# Altium PCB IR60-19_5GF.PcbDoc
Units mm, origin at the board's own origin, x right, y up, seen from the top; angles counter-clockwise.
Board outline 60 x 19.5 mm, 2 copper layers (Top Layer, Bottom Layer); 36 components, 34 nets, 72 pads, 32 vias.
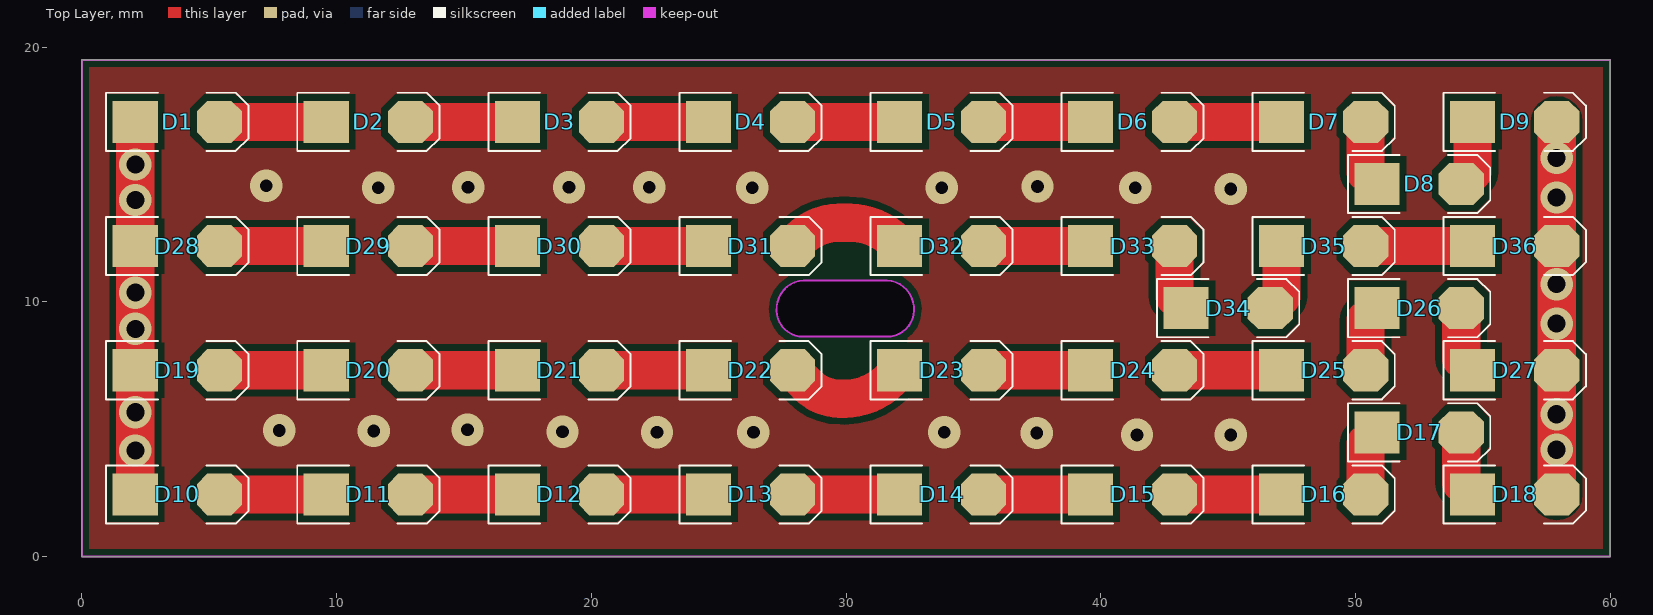
[diagram p0: Top Layer view]
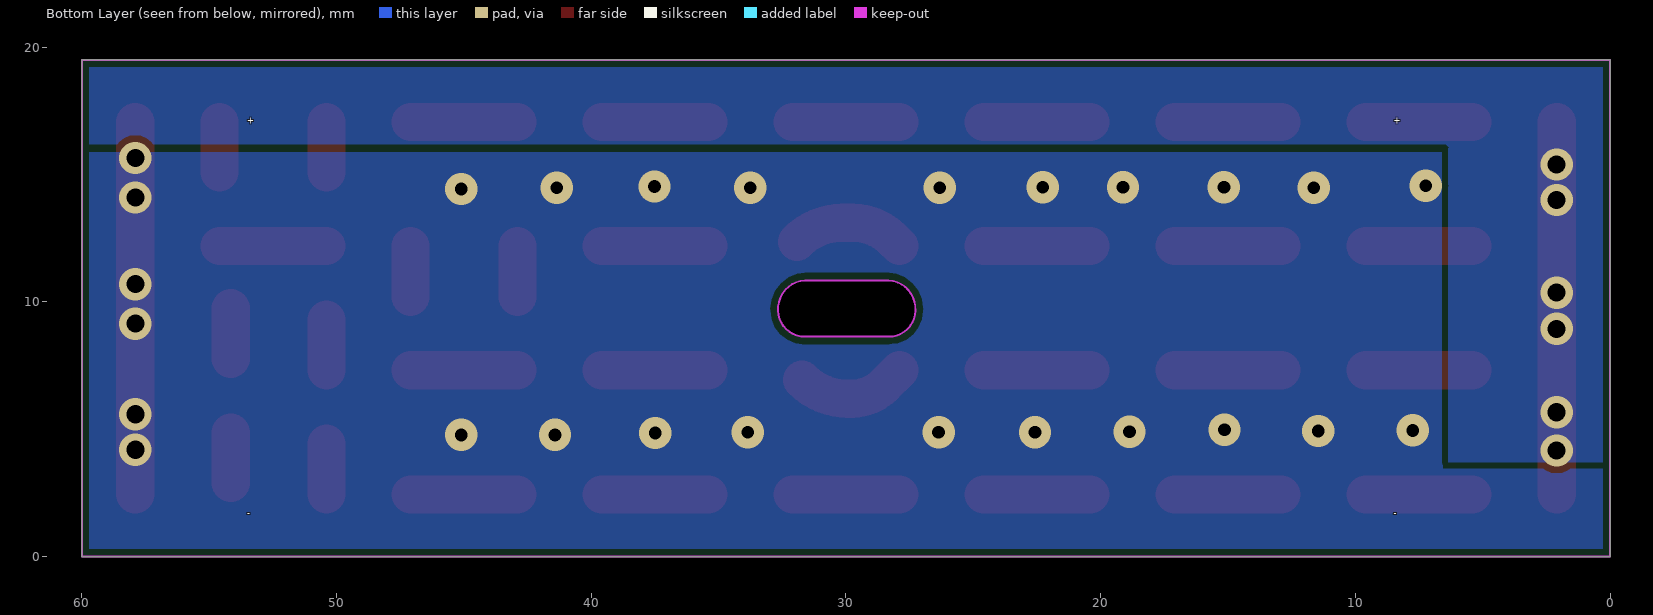
[diagram p1: Bottom Layer view, seen from below]
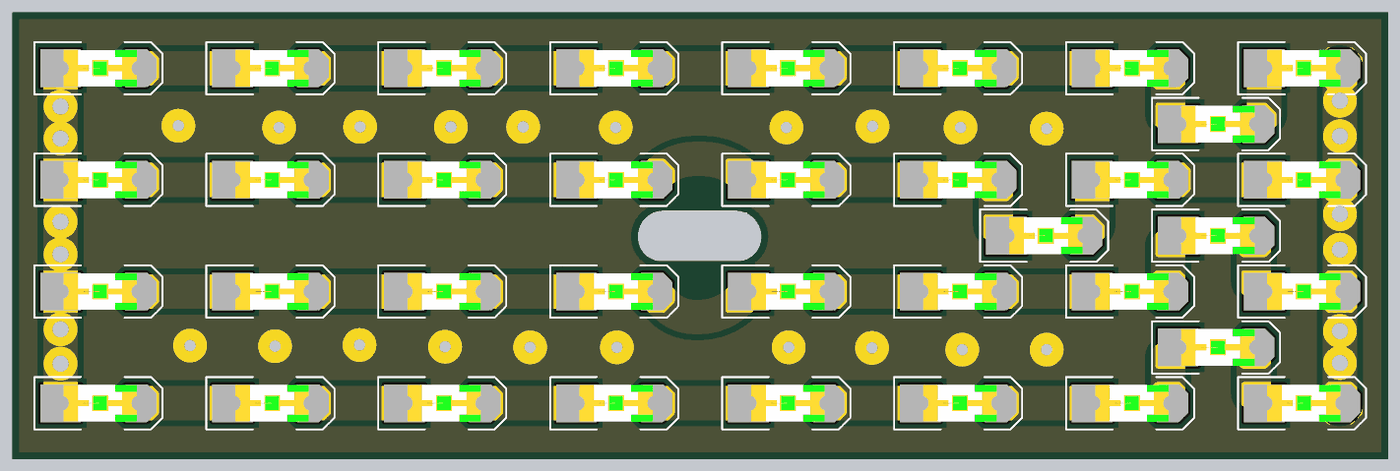
[diagram p2: 3D render of the assembled board from above, using the file's embedded part models]

## Layer stack, top to bottom
Top Solder: solder mask 0.0102, Solder Resist, Dk 3.5
Top Layer: signal copper 0.0356
Dielectric 1: dielectric 0.32, FR-4, Dk 4.8
Bottom Layer: signal copper 0.0356
Bottom Solder: solder mask 0.0102, Solder Resist, Dk 3.5

## Board outline
0,0 60,0 60,19.5 0,19.5
cut-out: 27.28,9.652 ccw(c28.308,9.665) 28.321,8.636 31.598,8.636 ccw(c31.623,9.677) 32.664,9.652 ccw(c31.54,9.721) 31.609,10.846 28.321,10.846 ccw(c28.397,9.728)

## Design rules (kind name [scope] priority, off if disabled: settings)
Clearance [All] p1: gap=0.254 ignorepadtopadclearanceinfootprint=FALSE except(0: Arc-Hole Track-Hole SMDPad-Hole THPad-Hole Via-Hole Fill-Hole Poly-Hole Region-Hole Text-Hole)
PolygonConnect [All] p1: connectstyle=Direct reliefconductorwidth=0.254 reliefentries=4 polygonreliefangle="90 Angle" airgapwidth=0.254
RoutingVias [All] p1: holewidth=0.711 width=1.27 viastyle="Through Hole" minholewidth=0.711 minwidth=1.27 maxholewidth=0.711 maxwidth=1.27
SolderMaskExpansion [All] p1: expansion=0.102
Width [All] p1: maxlimit=2 minlimit=0.254 preferedwidth=0.254 minimp=50.000000 maximp=50.000000 favimp=50.000000
30 further rules are at their usual default settings.

## Components (designator, comment, footprint, x,y, rotation, side; value= is the part's Value field where it differs from the comment)
D1 "LED1206" IRLED2835M 3.75,17.066 r0 top
D2 "LED1206" IRLED2835M 11.25,17.066 r0 top
D3 "LED1206" IRLED2835M 18.75,17.066 r0 top
D4 "LED1206" IRLED2835M 26.25,17.066 r0 top
D5 "LED1206" IRLED2835M 33.75,17.066 r0 top
D6 "LED1206" IRLED2835M 41.25,17.066 r0 top
D7 "LED1206" IRLED2835M 48.75,17.066 r0 top
D8 "LED1206" IRLED2835M 52.5,14.628 r0 top
D9 "LED1206" IRLED2835M 56.25,17.066 r0 top
D10 "LED1206" IRLED2835M 3.75,2.438 r0 top
D11 "LED1206" IRLED2835M 11.25,2.438 r0 top
D12 "LED1206" IRLED2835M 18.75,2.438 r0 top
D13 "LED1206" IRLED2835M 26.25,2.438 r0 top
D14 "LED1206" IRLED2835M 33.75,2.438 r0 top
D15 "LED1206" IRLED2835M 41.25,2.438 r0 top
D16 "LED1206" IRLED2835M 48.75,2.438 r0 top
D17 "LED1206" IRLED2835M 52.5,4.876 r0 top
D18 "LED1206" IRLED2835M 56.25,2.438 r0 top
D19 "LED1206" IRLED2835M 3.75,7.314 r0 top
D20 "LED1206" IRLED2835M 11.25,7.314 r0 top
D21 "LED1206" IRLED2835M 18.75,7.314 r0 top
D22 "LED1206" IRLED2835M 26.25,7.314 r0 top
D23 "LED1206" IRLED2835M 33.75,7.314 r0 top
D24 "LED1206" IRLED2835M 41.25,7.314 r0 top
D25 "LED1206" IRLED2835M 48.75,7.314 r0 top
D26 "LED1206" IRLED2835M 52.5,9.752 r0 top
D27 "LED1206" IRLED2835M 56.25,7.314 r0 top
D28 "LED1206" IRLED2835M 3.75,12.19 r0 top
D29 "LED1206" IRLED2835M 11.25,12.19 r0 top
D30 "LED1206" IRLED2835M 18.75,12.19 r0 top
D31 "LED1206" IRLED2835M 26.25,12.19 r0 top
D32 "LED1206" IRLED2835M 33.75,12.19 r0 top
D33 "LED1206" IRLED2835M 41.25,12.19 r0 top
D34 "LED1206" IRLED2835M 45,9.752 r0 top
D35 "LED1206" IRLED2835M 48.75,12.19 r0 top
D36 "LED1206" IRLED2835M 56.25,12.19 r0 top

## Footprints (in the part's own frame and the unit in brackets; to place one, negate y for a bottom-side part, rotate by r counter-clockwise, add the part's x,y. Pads: shape width x height; smd on the part's side, far side on the other; paste and mask are expansions set on the pad)
IRLED2835M [mil]
  rect 70x65 smd: 1(-65,0)
  oct 70x65 smd: 2(65,0)
  silkscreen extent -110,-45 110,45, body extent -60,-32 66,32, height 36

## Via types
v1: diameter 1.27, hole 0.5, Top Layer to Bottom Layer, 20 vias
v2: diameter 1.27, hole 0.712, Top Layer to Bottom Layer, 12 vias

## Nets (pads, with @x,y where several pads share a name; then routed paths per layer and width w, separated by ;. In a path a pad name is that pad's centre, name@x,y a point inside that pad or via, vN(x,y) a via of type N, cw(c..) or ccw(c..) an arc to the next point about the centre after c; other vN are vias at no path point)
GND: D9.2 D18.2 D27.2 D36.2 | length 14.6
  Top Layer w1.5: D18.2 D27.2 D36.2 D9.2
  other v1: 41.427,4.775 45.11,4.775 37.49,4.851 22.581,4.877 26.365,4.877 33.858,4.877 18.872,4.902 11.455,4.928 7.747,4.953 15.138,4.978 45.11,14.427 11.633,14.478 26.314,14.478 33.757,14.478 41.351,14.478 15.164,14.503 19.126,14.503 22.276,14.503 37.516,14.529 7.239,14.554
  other v2: 57.901,4.191 57.901,5.588 57.901,9.144 57.901,10.693 57.901,14.097 57.901,15.646
NetD1_2: D1.2 D2.1 | length 4.2
  Top Layer w1.5: D1.2 D2.1
NetD2_2: D2.2 D3.1 | length 4.2
  Top Layer w1.5: D2.2 D3.1
NetD3_2: D3.2 D4.1 | length 4.2
  Top Layer w1.5: D3.2 D4.1
NetD4_2: D4.2 D5.1 | length 4.2
  Top Layer w1.5: D4.2 D5.1
NetD5_2: D5.2 D6.1 | length 4.2
  Top Layer w1.5: D5.2 D6.1
NetD6_2: D6.2 D7.1 | length 4.2
  Top Layer w1.5: D6.2 D7.1
NetD7_2: D7.2 D8.1 | length 2
  Top Layer w1.5: D8.1@50.401,15.076 D7.2
NetD8_2: D8.2 D9.1 | length 2
  Top Layer w1.5: D8.2@54.599,15.076 D9.1
NetD10_2: D10.2 D11.1 | length 4.2
  Top Layer w1.5: D10.2 D11.1
NetD11_2: D11.2 D12.1 | length 4.2
  Top Layer w1.5: D11.2 D12.1
NetD12_2: D12.2 D13.1 | length 4.2
  Top Layer w1.5: D12.2 D13.1
NetD13_2: D13.2 D14.1 | length 4.2
  Top Layer w1.5: D13.2 D14.1
NetD14_2: D14.2 D15.1 | length 4.2
  Top Layer w1.5: D14.2 D15.1
NetD15_2: D15.2 D16.1 | length 4.2
  Top Layer w1.5: D15.2 D16.1
NetD16_2: D16.2 D17.1 | length 2
  Top Layer w1.5: D16.2 D17.1@50.401,4.428
NetD17_2: D17.2 D18.1 | length 2
  Top Layer w1.5: D18.1@54.151,2.886 D17.2
NetD19_2: D19.2 D20.1 | length 4.2
  Top Layer w1.5: D19.2 D20.1
NetD20_2: D20.2 D21.1 | length 4.2
  Top Layer w1.5: D20.2 D21.1
NetD21_2: D21.2 D22.1 | length 4.2
  Top Layer w1.5: D21.2 D22.1
NetD22_2: D22.2 D23.1 | length 4.4
  Top Layer w1.5: D22.2 28.486,6.729 ccw(c29.769,8.012) 29.769,6.198 29.93,6.198 ccw(c29.93,8.738) D23.1@31.727,6.942
NetD23_2: D23.2 D24.1 | length 4.2
  Top Layer w1.5: D23.2 D24.1
NetD24_2: D24.2 D25.1 | length 4.2
  Top Layer w1.5: D24.2 D25.1
NetD25_2: D25.2 D26.1 | length 2
  Top Layer w1.5: D25.2 D26.1@50.401,9.304
NetD26_2: D26.2 D27.1 | length 2
  Top Layer w1.5: D27.1@54.151,7.762 D26.2
NetD28_2: D28.2 D29.1 | length 4.2
  Top Layer w1.5: D28.2 D29.1
NetD29_2: D29.2 D30.1 | length 4.2
  Top Layer w1.5: D29.2 D30.1
NetD30_2: D30.2 D31.1 | length 4.2
  Top Layer w1.5: D30.2 D31.1
NetD31_2: D31.2 D32.1 | length 4.5
  Top Layer w1.5: D31.2 28.163,12.452 cw(c29.743,10.871) 29.743,13.106 30.13,13.106 cw(c30.13,10.566) D32.1@31.927,12.362
NetD32_2: D32.2 D33.1 | length 4.2
  Top Layer w1.5: D32.2 D33.1
NetD33_2: D33.2 D34.1 | length 2
  Top Layer w1.5: D34.1@42.901,10.2 D33.2
NetD34_2: D34.2 D35.1 | length 2
  Top Layer w1.5: D34.2@47.099,10.2 D35.1
NetD35_2: D35.2 D36.1 | length 4.2
  Top Layer w1.5: D35.2 D36.1
VCC: D1.1 D10.1 D19.1 D28.1 | length 14.6
  Top Layer w1.5: D10.1 D19.1 D28.1 D1.1
  other v2: 2.099,4.166 2.099,5.664 2.099,8.941 2.099,10.363 2.099,13.995 2.099,15.392

## Polygon pours and split planes (outlines as drawn)
GND on Top Layer "mos_gnd" (solid, remove dead copper, pour order 14): 0,19.5 0,0 60,0 60,19.5
GND on Bottom Layer "mos_gnd" (solid, remove dead copper, pour order 20): 0,0 0,3.429 0.025,3.454 6.579,3.454 6.579,15.85 6.604,15.875 59.969,15.875 59.969,0.031 60,0
VCC on Bottom Layer "mos_gnd" (solid, remove dead copper, pour order 18): 0,3.683 0.025,3.708 6.35,3.708 6.35,16.027 6.325,16.053 6.452,16.18 60,16.18 60,19.5 0,19.5
GND on Bottom Layer "mos_gnd" (solid, remove dead copper, pour order 16): 0,3.683

## Keep-outs
Keep-Out Layer:
  lines w0.076: 0,0 0,19.5 60,19.5 60,0 0,0 ; 27.28,9.652 ccw(c28.308,9.665) 28.321,8.636 29.972,8.636 31.598,8.636 ccw(c31.623,9.677) 32.664,9.652 ccw(c31.54,9.721) 31.609,10.846 30.023,10.846 28.321,10.846 ccw(c28.397,9.728) 27.28,9.652

## Silkscreen, mask and mechanical layers (free items; w line width, h text height)
Bottom Overlay:
  text "+" at 8.23,16.99 h0.25
  text "+" at 53.23,16.99 h0.25
  text "-" at 8.38,1.59 h0.25
  text "-" at 53.38,1.59 h0.25
Bottom Solder:
  region: 55.1,18.78 55.11,18.77 59.33,18.77 59.33,16.68 59.32,16.69 55.1,16.69
  region: 55.03,2.785 55.04,2.775 59.26,2.775 59.26,0.685 59.25,0.695 55.03,0.695
  region: 0.61,2.825 0.62,2.815 4.84,2.815 4.84,0.725 4.83,0.735 0.61,0.735
  region: 0.68,18.82 0.69,18.81 4.91,18.81 4.91,16.72 4.9,16.73 0.68,16.73